# EAGLE board scema (EAGLE 6.5.0)

Size 82 x 38 mm. Coordinates in mm from the lower left corner, seen from the top.
Outline: 0,0 82,0 82,38 0,38 0,0
Outline: circle at 3,34 radius 2.54
Outline: circle at 78,34 radius 2.54
Outline: circle at 3,3 radius 2.54
Outline: circle at 78,3 radius 2.54
Copper layers (1*16): Top 0.035mm / dielectric 1.5mm / Bottom 0.035mm
Design rules "default": minimum track width 10mil, minimum drill 24mil, track to track 8mil, track to pad 8mil, pad to pad 8mil, via to via 8mil, smd to smd 8mil, copper to edge 40mil, drill to drill 8mil, minimum pad ring 10mil, minimum via ring 8mil, stop-mask expansion 4mil, vias tented up to drill 0mil, thermal gap 10mil

## Footprints (pad centres in the part's own frame; a part is rotated, then mirrored left to right if it is on the bottom)
SE14 = drill 1.397 pad 2.54 octagon: MP 0,0
1X16_LONGPADS = drill 1.118 pad 1.88 long: 1 0,0; 2 2.54,0; 3 5.08,0; 4 7.62,0; 5 10.16,0; 6 12.7,0; 7 15.24,0; 8 17.78,0; 9 20.32,0; 10 22.86,0; 11 25.4,0; 12 27.94,0; 13 30.48,0; 14 33.02,0; 15 35.56,0; 16 38.1,0
CY8CKIT-049-41XX = drill 0.8: 0.0 -10.16,22.86; 0.1 -10.16,20.32; 0.2 -10.16,17.78; 0.3 -10.16,15.24; 0.4 -10.16,12.7; 0.5 -10.16,10.16; 0.6 -10.16,7.62; 0.7 -10.16,5.08; 1.0 -10.16,2.54; 1.1 -10.16,0; 1.2 -10.16,-2.54; 1.3 -10.16,-5.08; 1.4 -10.16,-7.62; 1.5 -10.16,-10.16; 1.6 -10.16,-12.7; 1.7 -10.16,-15.24; 2.0 10.59,-17.78; 2.1 10.59,-15.24; 2.2 10.59,-12.7; 2.3 10.59,-10.16; 2.4 10.59,-7.62; 2.5 10.59,-5.08; 2.6 10.59,-2.54; 2.7 10.59,0; 3.0 10.59,2.54; 3.1 10.59,5.08; 3.2 10.59,7.62; 3.3 10.59,10.16; 3.4 10.59,12.7; 3.5 10.59,15.24; 3.6 10.59,17.78; 3.7 10.59,20.32; 4.1 -10.16,30.48; 4.2 -10.16,27.94; 4.3 -10.16,25.4; GND -10.16,-17.78; GND1 10.59,-20.32; GND2 10.59,30.48; RESET 10.59,27.94; SWDCLK 10.59,25.4; SWDIO 10.59,22.86; VDD -10.16,-20.32 | drill 0.8 square: 4.0 -10.16,33.02; VDD2 10.59,33.02

## Placement (x,y rotation side)
3.3  SE14  [SE14]  78,18.66 0 top
GND  SE14  [SE14]  78,13.66 0 top
LCD  M16LONGPADS  [1X16_LONGPADS]  70,34 0 bottom
U$1  PSOC4DEV  [CY8CKIT-049-41XX]  41.02,17.88 270 top

## Library data of the parts
3.3 GND = solpad
LCD = SparkFun-Connectors
U$1 = PSoC4-devkit

## Nets
+3.3: 3.3.MP LCD.2 LCD.15 U$1.VDD U$1.VDD2
D4: LCD.11 U$1.0.0
D5: LCD.12 U$1.0.1
D6: LCD.13 U$1.0.2
D7: LCD.14 U$1.0.3
E: LCD.6 U$1.0.4
GND: GND.MP LCD.1 LCD.16 U$1.GND U$1.GND1 U$1.GND2
PWM1: U$1.1.1
PWM2: U$1.1.2
PWM3: U$1.1.3
RS: LCD.4 U$1.0.5
RW: LCD.5 U$1.0.6
V0: LCD.3

## Tracks (layer width: path | path; a pad name or v marks a point on that pad's centre or on a via)
+3.3  (4 unrouted)
D4  (1 unrouted)
D5  (1 unrouted)
D6  (1 unrouted)
D7  (1 unrouted)
E  (1 unrouted)
GND  (5 unrouted)
RS  (1 unrouted)
RW  (1 unrouted)